# EAGLE board 8x8 LED Matrix (EAGLE 9.7.0)

Size 119.33 x 132.41 mm. Coordinates in mm from the lower left corner, seen from the top.
Outline: 0,0 119.33,0 119.33,132.41 0,132.41 0,0
Copper layers (1*16): Top 0.035mm / dielectric 1.5mm / Bottom 0.035mm
Design rules "default": minimum track width 6mil, minimum drill 0.35mm, track to track 6mil, track to pad 6mil, pad to pad 6mil, via to via 6mil, smd to smd 6mil, copper to edge 40mil, drill to drill 6mil, minimum pad ring 10mil, minimum via ring 8mil, stop-mask expansion 4mil, vias tented up to drill 0mil, thermal gap 10mil

## Footprints (pad centres in the part's own frame; a part is rotated, then mirrored left to right if it is on the bottom)
LEDRD254W60D565H860B = drill 0.981 pad 1.581: 1 -1.27,0; 2 1.27,0
ARDUINO-UNO-R3-SHIELD = drill 1.016 pad 1.88: 3.3V 24.13,-2.54; 5V 24.13,0; A0 24.13,12.7; A1 24.13,15.24; A2 24.13,17.78; A3 24.13,20.32; A4 24.13,22.86; A5 24.13,25.4; AREF -24.13,-13.97; D2 -24.13,20.32; D3 -24.13,17.78; D4 -24.13,15.24; D5 -24.13,12.7; D6 -24.13,10.16; D7 -24.13,7.62; D8 -24.13,3.81; D9 -24.13,1.27; D10 -24.13,-1.27; D11 -24.13,-3.81; D12 -24.13,-6.35; D13 -24.13,-8.89; GND@0 24.13,2.54; GND@1 24.13,5.08; GND@2 -24.13,-11.43; IOREF 24.13,-7.62; NC 24.13,-10.16; RES 24.13,-5.08; RX -24.13,25.4; SCL -24.13,-19.05; SDA -24.13,-16.51; TX -24.13,22.86; VIN 24.13,7.62

## Placement (x,y rotation side)
D1  RED  [LEDRD254W60D565H860B]  59.81,124.51 180 top
D2  RED  [LEDRD254W60D565H860B]  67.19,124.51 180 top
D3  RED  [LEDRD254W60D565H860B]  74.81,124.51 180 top
D4  RED  [LEDRD254W60D565H860B]  82.43,124.51 180 top
D5  RED  [LEDRD254W60D565H860B]  90.05,124.51 180 top
D6  RED  [LEDRD254W60D565H860B]  97.67,124.51 180 top
D7  RED  [LEDRD254W60D565H860B]  105.05,124.51 180 top
D8  RED  [LEDRD254W60D565H860B]  112.53,124.04 180 top
D9  RED  [LEDRD254W60D565H860B]  59.57,116.38 180 top
D10  RED  [LEDRD254W60D565H860B]  67.19,116.38 180 top
D11  RED  [LEDRD254W60D565H860B]  74.81,116.38 180 top
D12  RED  [LEDRD254W60D565H860B]  82.43,116.38 180 top
D13  RED  [LEDRD254W60D565H860B]  90.05,116.38 180 top
D14  RED  [LEDRD254W60D565H860B]  97.67,116.38 180 top
D15  RED  [LEDRD254W60D565H860B]  105.53,116.38 180 top
D16  RED  [LEDRD254W60D565H860B]  113.27,115.9 180 top
D17  RED  [LEDRD254W60D565H860B]  59.57,108.25 180 top
D18  RED  [LEDRD254W60D565H860B]  67.43,108.49 180 top
D19  RED  [LEDRD254W60D565H860B]  74.93,108.49 180 top
D20  RED  [LEDRD254W60D565H860B]  82.43,108.25 180 top
D21  RED  [LEDRD254W60D565H860B]  90.05,108.25 180 top
D22  RED  [LEDRD254W60D565H860B]  97.67,108.49 180 top
D23  RED  [LEDRD254W60D565H860B]  105.29,108.49 180 top
D24  RED  [LEDRD254W60D565H860B]  112.91,108.25 180 top
D25  RED  [LEDRD254W60D565H860B]  59.57,100.12 180 top
D26  RED  [LEDRD254W60D565H860B]  67.31,100.6 180 top
D27  RED  [LEDRD254W60D565H860B]  74.7,100.36 180 top
D28  RED  [LEDRD254W60D565H860B]  83.26,100.12 180 top
D29  RED  [LEDRD254W60D565H860B]  90.05,100.12 180 top
D30  RED  [LEDRD254W60D565H860B]  97.67,100.12 180 top
D31  RED  [LEDRD254W60D565H860B]  105.29,100.12 180 top
D32  RED  [LEDRD254W60D565H860B]  112.91,100.12 180 top
D33  RED  [LEDRD254W60D565H860B]  59.57,91.99 180 top
D34  RED  [LEDRD254W60D565H860B]  67.19,91.88 180 top
D35  RED  [LEDRD254W60D565H860B]  75.05,91.28 180 top
D36  RED  [LEDRD254W60D565H860B]  82.91,91.88 180 top
D37  RED  [LEDRD254W60D565H860B]  90.05,91.99 180 top
D38  RED  [LEDRD254W60D565H860B]  97.91,91.76 180 top
D39  RED  [LEDRD254W60D565H860B]  105.29,92.47 180 top
D40  RED  [LEDRD254W60D565H860B]  112.91,91.99 180 top
D41  RED  [LEDRD254W60D565H860B]  59.57,83.87 180 top
D42  RED  [LEDRD254W60D565H860B]  67.19,83.87 180 top
D43  RED  [LEDRD254W60D565H860B]  75.05,83.75 180 top
D44  RED  [LEDRD254W60D565H860B]  82.32,83.51 180 top
D45  RED  [LEDRD254W60D565H860B]  90.05,83.87 180 top
D46  RED  [LEDRD254W60D565H860B]  98.15,83.16 180 top
D47  RED  [LEDRD254W60D565H860B]  105.29,83.87 180 top
D48  RED  [LEDRD254W60D565H860B]  112.91,83.87 180 top
D49  RED  [LEDRD254W60D565H860B]  59.57,75.74 180 top
D50  RED  [LEDRD254W60D565H860B]  67.31,75.62 180 top
D51  RED  [LEDRD254W60D565H860B]  74.7,75.62 180 top
D52  RED  [LEDRD254W60D565H860B]  82.55,75.74 180 top
D53  RED  [LEDRD254W60D565H860B]  90.05,75.97 180 top
D54  RED  [LEDRD254W60D565H860B]  97.67,75.74 180 top
D55  RED  [LEDRD254W60D565H860B]  105.29,75.74 180 top
D56  RED  [LEDRD254W60D565H860B]  112.91,75.74 180 top
D57  RED  [LEDRD254W60D565H860B]  59.33,67.61 180 top
D58  RED  [LEDRD254W60D565H860B]  67.43,67.61 180 top
D59  RED  [LEDRD254W60D565H860B]  74.93,67.37 180 top
D60  RED  [LEDRD254W60D565H860B]  82.91,67.25 180 top
D61  RED  [LEDRD254W60D565H860B]  90.05,67.61 180 top
D62  RED  [LEDRD254W60D565H860B]  97.67,67.61 180 top
D63  RED  [LEDRD254W60D565H860B]  105.78,67.36 180 top
D64  RED  [LEDRD254W60D565H860B]  112.68,67.61 180 top
U1  ARDUINO-UNO-R3-SHIELD  [ARDUINO-UNO-R3-SHIELD]  47.88,29.84 270 top

## Library data of the parts
D1-D64 = Tinkercad; CATEGORY: Opto-Electronic; SUB-CATEGORY: LED; VALUE: LED_RED
U1 = Tinkercad

## Nets
U1_A1: D8.1 D16.1 D24.1 D32.1 D40.1 D48.1 D56.1 D64.1 U1.A1
U1_A2: D7.1 D15.1 D23.1 D31.1 D39.1 D47.1 D55.1 D63.1 U1.A2
U1_A3: D6.1 D14.1 D22.1 D30.1 D38.1 D46.1 D54.1 D62.1 U1.A3
U1_A4: D5.1 D13.1 D21.1 D29.1 D37.1 D45.1 D53.1 D61.1 U1.A4
U1_D2: D4.1 D12.1 D20.1 D28.1 D36.1 D44.1 D52.1 D60.1 U1.D2
U1_D3: D3.1 D11.1 D19.1 D27.1 D35.1 D43.1 D51.1 D59.1 U1.D3
U1_D4: D2.1 D10.1 D18.1 D26.1 D34.1 D42.1 D50.1 D58.1 U1.D4
U1_D5: D1.1 D9.1 D17.1 D25.1 D33.1 D41.1 D49.1 D57.1 U1.D5
U1_D6: D57.2 D58.2 D59.2 D60.2 D61.2 D62.2 D63.2 D64.2 U1.D6
U1_D7: D49.2 D50.2 D51.2 D52.2 D53.2 D54.2 D55.2 D56.2 U1.D7
U1_D8: D41.2 D42.2 D43.2 D44.2 D45.2 D46.2 D47.2 D48.2 U1.D8
U1_D9: D33.2 D34.2 D35.2 D36.2 D37.2 D38.2 D39.2 D40.2 U1.D9
U1_D10: D25.2 D26.2 D27.2 D28.2 D29.2 D30.2 D31.2 D32.2 U1.D10
U1_D11: D17.2 D18.2 D19.2 D20.2 D21.2 D22.2 D23.2 D24.2 U1.D11
U1_D12: D9.2 D10.2 D11.2 D12.2 D13.2 D14.2 D15.2 D16.2 U1.D12
U1_D13: D1.2 D2.2 D3.2 D4.2 D5.2 D6.2 D7.2 D8.2 U1.D13

## Tracks (layer width: path | path; a pad name or v marks a point on that pad's centre or on a via)
U1_A1  (8 unrouted)
U1_A2  (8 unrouted)
U1_A3  (8 unrouted)
U1_A4  (8 unrouted)
U1_D2  (8 unrouted)
U1_D3  (8 unrouted)
U1_D4  (8 unrouted)
U1_D5  (8 unrouted)
U1_D6  (8 unrouted)
U1_D7  (8 unrouted)
U1_D8  (8 unrouted)
U1_D9  (8 unrouted)
U1_D10  (8 unrouted)
U1_D11  (8 unrouted)
U1_D12  (8 unrouted)
U1_D13  (8 unrouted)